# Altium PCB bms_fan_breakout-1_0.PcbDoc
Units mm, origin at the board's own origin, x right, y up, seen from the top; angles counter-clockwise.
Board outline 30 x 30 mm, 4 copper layers (L1, L2, L3, L4), stack 1.586 mm thick; 15 components, 12 nets, 40 pads, 0 vias.
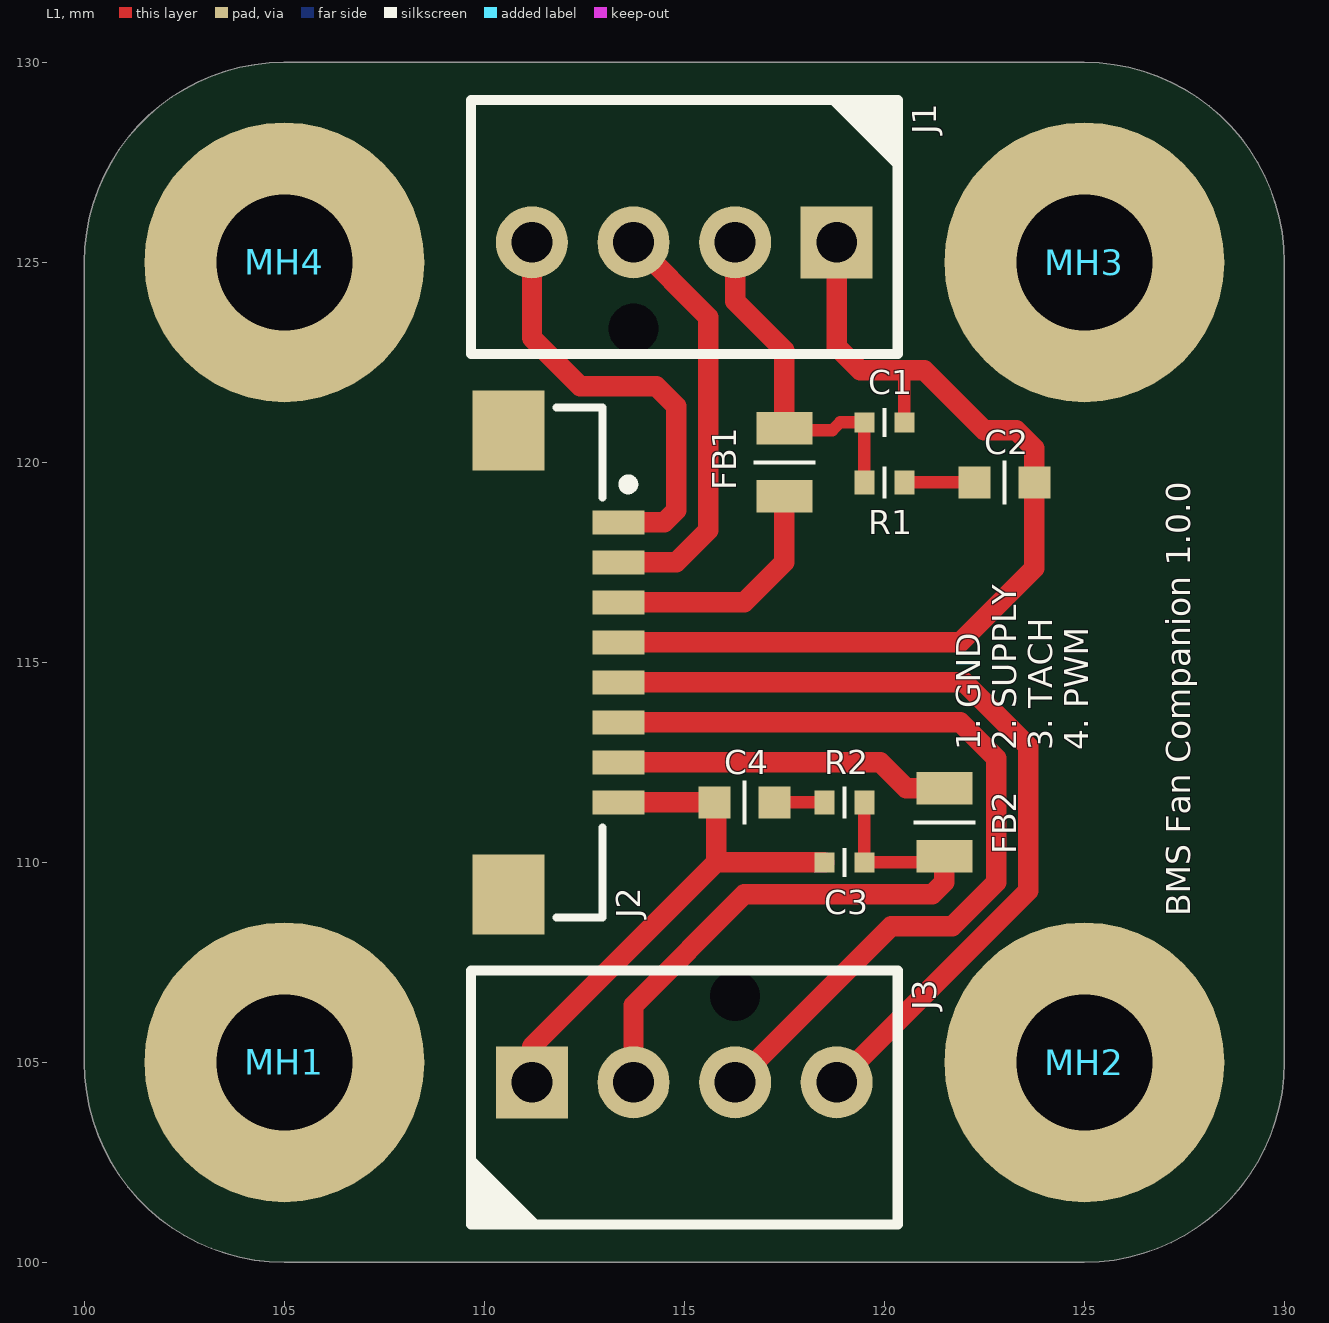
[diagram p0: L1 view]
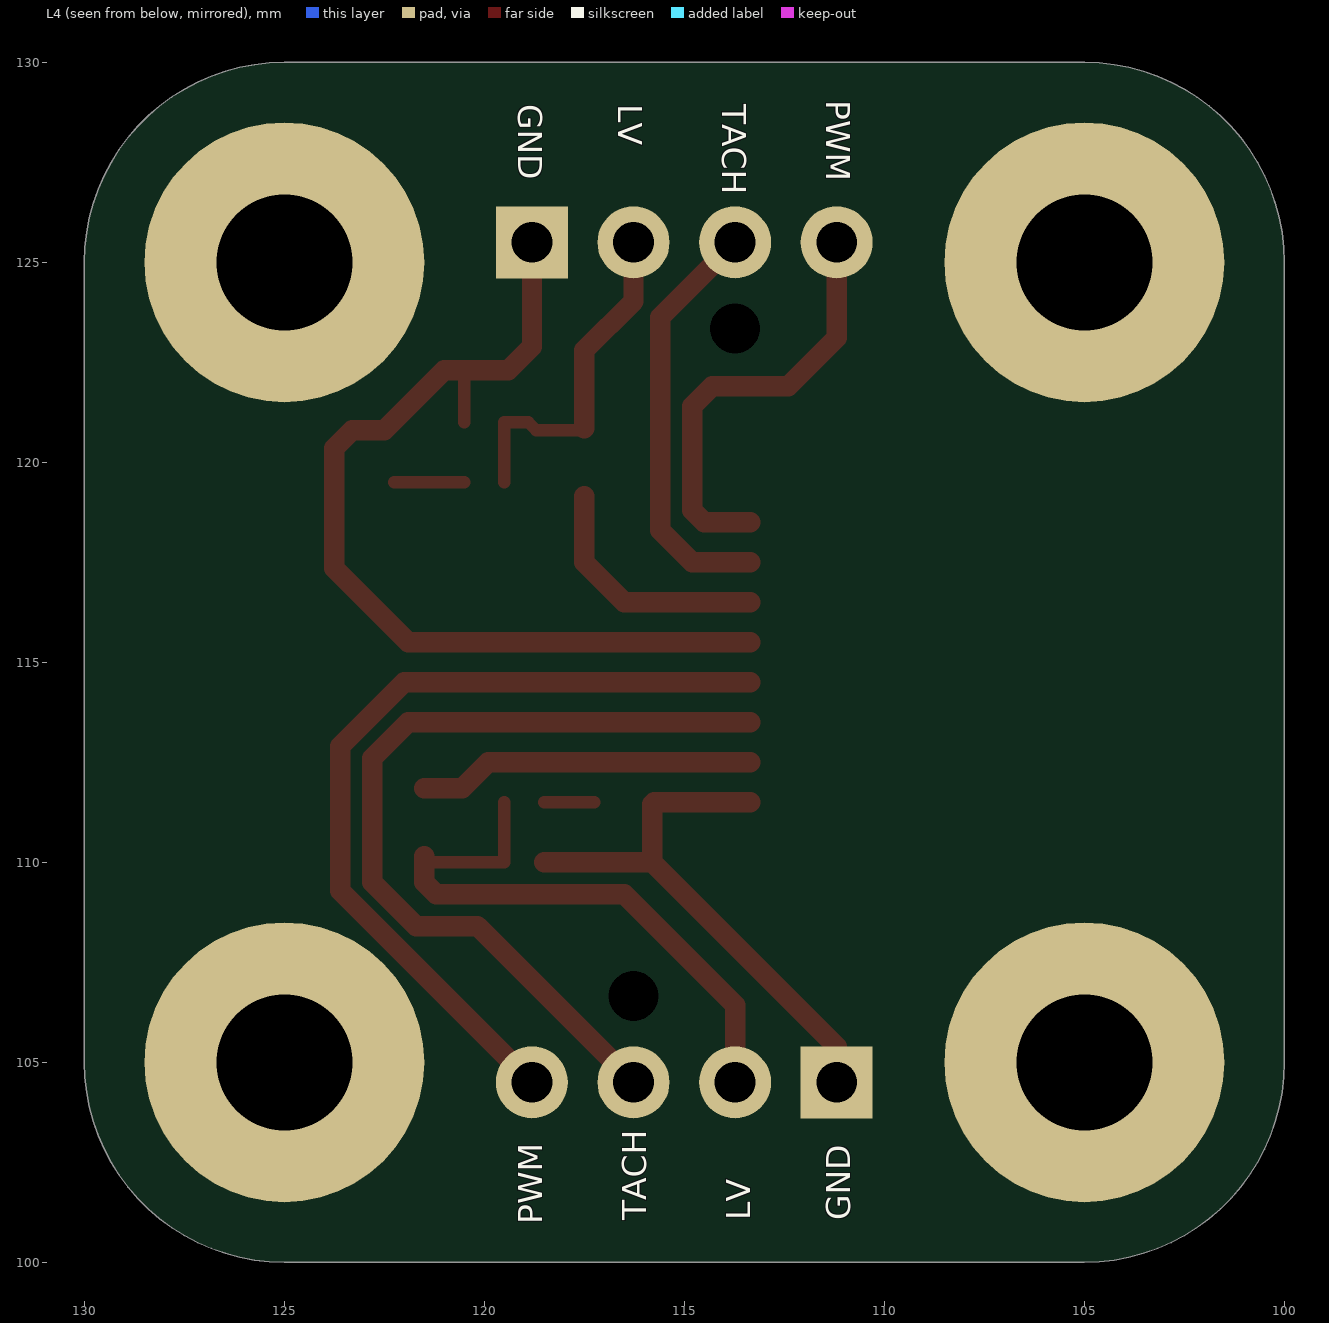
[diagram p1: L4 view, seen from below]

## Layer stack, top to bottom
Top Solder: solder mask 0.0127, Solder Resist, Dk 1
L1: signal copper 0.035
D1: prepreg 0.2104, 7628, Dk 4.4
L2: signal copper 0.0152
D2: core 1.065, Core, Dk 4.6
L3: signal copper 0.0152
D3: prepreg 0.2104, 7628, Dk 4.4
L4: signal copper 0.035
Bottom Solder: solder mask 0.0127, Solder Resist, Dk 1

## Board outline
105,100 cw(c105,105) 100,105 100,125 cw(c105,125) 105,130 125,130 cw(c125,125) 130,125 130,105 cw(c125,105) 125,100

## Design rules (kind name [scope] priority, off if disabled: settings)
AcuteAngle [All] p1: minimum=7.00000000000000E+0001 checktracksonly=FALSE
AssemblyTestPointUsage [All] p1: valid=2
BoardOutlineClearance [All] p1: gap=0.635 ignorepadtopadclearanceinfootprint=FALSE except(0: Arc-SplitContinuation Track-SplitContinuation SMDPad-SplitContinuation THPad-SplitContinuation Via-SplitContinuation Fill-SplitContinuation Poly-SplitContinuation Region-SplitContinuation Text-SplitContinuation)
Clearance [All] p1: gap=0.152 ignorepadtopadclearanceinfootprint=TRUE except(0.254: Fill-Fill Fill-Poly Fill-Region Poly-Poly Poly-Region Region-Region)
ComponentClearance [All] p1 off: gap=0.254 collisioncheckmode=3 verticalgap=0.254 showdistances=FALSE
DiffPairsRouting DE_90 [InDifferentialPairClass('DE_90')] p1: maxlimit=0.203 minlimit=0.152 mostfreqgap=0.203 toplayer_minwidth=0.152 toplayer_maxwidth=0.286 toplayer_prefwidth=0.286 midlayer1_minwidth=0.152 midlayer1_maxwidth=0.286 midlayer1_prefwidth=0.286 midlayer2_minwidth=0.152 midlayer2_maxwidth=0.286 midlayer2_prefwidth=0.286 bottomlayer_minwidth=0.152 bottomlayer_maxwidth=0.286 bottomlayer_prefwidth=0.286 maxuncoupledlength=12.7
DiffPairsRouting DE_100 [InDifferentialPairClass('DE_100')] p2: maxlimit=0.203 minlimit=0.152 mostfreqgap=0.203 toplayer_minwidth=0.152 toplayer_maxwidth=0.22 toplayer_prefwidth=0.22 midlayer1_minwidth=0.152 midlayer1_maxwidth=0.22 midlayer1_prefwidth=0.22 midlayer2_minwidth=0.152 midlayer2_maxwidth=0.22 midlayer2_prefwidth=0.22 bottomlayer_minwidth=0.152 bottomlayer_maxwidth=0.22 bottomlayer_prefwidth=0.22 maxuncoupledlength=12.7
FabricationTestPointUsage [All] p1: valid=2 allowmultiple=FALSE
Height [All] p1: minheight=0 maxheight=50.8 prefheight=12.7
HoleSize [All] p1: absolutevalues=TRUE maxlimit=50.8 minlimit=0.2 maxpercent=80.000 minpercent=20.000
HoleToHoleClearance [All] p1: gap=0.5 allowstackedmicrovias=TRUE
MinimumAnnularRing MinimumViaRing [IsVia] p1: minimumring=0.072
MinimumAnnularRing [All] p2: minimumring=0.15
MinimumSolderMaskSliver [All] p1: minsoldermaskwidth=0.025
PlaneClearance [All] p1: clearance=0.203
PlaneConnect [All] p1: pad.planeconnectstyle=Relief pad.reliefexpansion=0.508 pad.reliefentries=4 pad.reliefconductorwidth=0.381 pad.reliefairgap=0.254 via.planeconnectstyle=Direct via.reliefexpansion=0.508 via.reliefentries=4 via.reliefconductorwidth=0.254 via.reliefairgap=0.254
PolygonConnect Heavy [HasFootprint('RELAY_FTR-J2') or HasFootprint('RELAY_P126') or HasFootprint('TE_ET_2173132-1') or HasFootprint('TE_ET_1982295-2') or HasFootprint('C2220_2.80MM') or HasFootprint('VISHAY_WSL2726') or HasFootprint('FUSEHOLDER_LITTELFUSE_01020071Z') or HasFootprint('EATON_ELV10-xx-2P')] p1: connectstyle=Direct reliefconductorwidth=0.254 reliefentries=4 polygonreliefangle="90 Angle" airgapwidth=0.254
PolygonConnect [All] p2: thpad.connectstyle=Relief thpad.reliefconductorwidth=0.381 thpad.reliefentries=4 thpad.polygonreliefangle="90 Angle" thpad.airgapwidth=0.254 smdpad.connectstyle=Relief smdpad.reliefconductorwidth=0.254 smdpad.reliefentries=4 smdpad.polygonreliefangle="90 Angle" smdpad.airgapwidth=0.254 via.connectstyle=Direct via.reliefconductorwidth=0.254 via.reliefentries=4 via.polygonreliefangle="90 Angle" via.airgapwidth=0.254
RoutingVias [All] p1: holewidth=0.2 width=0.35 viastyle="Through Hole" minholewidth=0.2 minwidth=0.35 maxholewidth=25.4 maxwidth=25.4
SilkToSilkClearance [All] p1: silktosilkclearance=0.076
SilkToSolderMaskClearance SilkscreenOverComponentPads [IsPad] p1: minsilkscreentomaskgap=0.003 clearancetoexposedcopper=FALSE
SolderMaskExpansion Vias [IsVia] p1: expansion=0.051 istentingtop=FALSE soldermaskfromhole=TRUE
SolderMaskExpansion "Default expansion" [All] p2: expansion=0.076 istentingtop=FALSE
UnRoutedNet [All] p1: checkbadconnections=TRUE
Width SE_50 [InNetClass('SE_50')] p1: maxlimit=0.349 minlimit=0.152 preferedwidth=0.349
Width [All] p2: maxlimit=50.8 minlimit=0.152 preferedwidth=0.203
17 further rules are at their usual default settings.

## Components (designator, comment, footprint, x,y, rotation, side; value= is the part's Value field where it differs from the comment)
C1 "CGA2B3X7R1H104M050BB" C0402_0.55MM 120,121 r0 top
C2 "CGJ3E1X7R1E105K080AC" C0603_0.80MM 123,119.5 r0 top
C3 "CGA2B3X7R1H104M050BB" C0402_0.55MM 119,110 r180 top
C4 "CGJ3E1X7R1E105K080AC" C0603_0.80MM 116.5,111.5 r180 top
FB1 "MPZ2012S102AT000" FB0805_1.05MM 117.5,120 r90 top
FB2 "MPZ2012S102AT000" FB0805_1.05MM 121.5,111 r270 top
J1 "47053-1000" MOLEX_KK254_4POS_VERT_0470531000 115,125.5 r0 top
J2 "686108148922" WURTH_WR-FPC_1.00mm_686108148922 110,115 r270 top
J3 "47053-1000" MOLEX_KK254_4POS_VERT_0470531000 115,104.5 r180 top
MH1 "HOLE" HOLE_M3 105,105 r0 top locked
MH2 "HOLE" HOLE_M3 125,105 r0 top locked
MH3 "HOLE" HOLE_M3 125,125 r0 top locked
MH4 "HOLE" HOLE_M3 105,125 r0 top locked
R1 "ERJ-2BQF1R0X" R0402_0.40MM 120,119.5 r180 top
R2 "ERJ-2BQF1R0X" R0402_0.40MM 119,111.5 r0 top

## Footprints (in the part's own frame and the unit in brackets; to place one, negate y for a bottom-side part, rotate by r counter-clockwise, add the part's x,y. Pads: shape width x height; smd on the part's side, far side on the other; paste and mask are expansions set on the pad)
C0402_0.55MM [mm]
  rect 0.5x0.5 smd: 1(-0.5,0) 2(0.5,0)
  silkscreen extent -0.05,-0.36 0.05,0.36, body extent -0.5,-0.25 0.5,0.25, height 0.55
C0603_0.80MM [mm]
  rect 0.8x0.8 smd: 1(-0.75,0) 2(0.75,0)
  silkscreen extent -0.05,-0.55 0.05,0.55, body extent -0.8,-0.4 0.8,0.4, height 0.8
FB0805_1.05MM [mm]
  rect 0.81x1.4 smd: 1(-0.85,0) 2(0.85,0)
  silkscreen extent -0.05,-0.78 0.05,0.77, body extent -1,-0.63 1,0.63, height 1.05
HOLE_M3 [mm]
  round 7 hole 3.4: 1(0,0)
MOLEX_KK254_4POS_VERT_0470531000 [mm]
  rect 1.8x1.8 hole 1.02: 1(3.81,0)
  round 1.8 hole 1.02: 2(1.27,0) 3(-1.27,0) 4(-3.81,0)
  round 0 hole 1.25: 5(-1.27,-2.16)
  silkscreen extent -5.33,-2.79 5.33,3.56, body extent -5.1,-2.54 5.1,3.3, height 10.01
R0402_0.40MM [mm]
  rect 0.5x0.6 smd: 1(-0.5,0) 2(0.5,0)
  silkscreen extent -0.05,-0.4 0.05,0.4, body extent -0.5,-0.25 0.5,0.25, height 0.4
WURTH_WR-FPC_1.00mm_686108148922 [mm]
  rect 0.6x1.3 smd: 1(-3.5,3.35) 2(-2.5,3.35) 3(-1.5,3.35) 4(-0.5,3.35) 5(0.5,3.35) 6(1.5,3.35) 7(2.5,3.35) 8(3.5,3.35)
  rect 2x1.8 smd: EP0(-5.8,0.6) EP1(5.8,0.6)
  silkscreen extent -6.38,1.8 6.38,3.73, body extent -6.3,-2.9 6.3,3.6, height 2.27

## Part data
C1 C3: "CAP CER 0.1UF 50V X7R 0402", Capacitance=0.1µF, Manufacturer="TDK Corporation", Operating Temperature="-55°C ~ 125°C", Package / Case="0402 (1005 Metric)", Supplier Part Number 1=445-12271-1-ND, Temperature Coefficient=X7R, Tolerance=±20%, Voltage - Rated=50V, Applications=AEC-Q200, ComponentLink1Description="Series Datasheet", ComponentLink1URL=https://product.tdk.com/info/en/catalog/datasheets/mlcc_automotive_general_en.pdf?ref_disty=digikey, Manufacturer Part Number=CGA2B3X7R1H104M050BB, Mounting Type="Surface Mount, MLCC", Part Status=Active, Series=CGA, Size / Dimension="0.039\" L x 0.020\" W (1.00mm x 0.50mm)", Supplier 1=Digikey, Thickness (Max)="0.022\" (0.55mm)", Unit Price (USD)=0.17
C2 C4: "CAP CER 1UF 25V X7R 0603", Capacitance=1µF, Manufacturer="TDK Corporation", Operating Temperature="-55°C ~ 125°C", Package / Case="0603 (1608 Metric)", Supplier Part Number 1=445-13311-1-ND, Temperature Coefficient=X7R, Tolerance=±10%, Voltage - Rated=25V, Applications=AEC-Q200, ComponentLink1Description="Series Datasheet", ComponentLink1URL=https://product.tdk.com/info/en/catalog/datasheets/mlcc_highreliability_general_en.pdf?ref_disty=digikey, Manufacturer Part Number=CGJ3E1X7R1E105K080AC, Mounting Type="Surface Mount, MLCC", Part Status=Active, Series=CGJ, Size / Dimension="0.063\" L x 0.031\" W (1.60mm x 0.80mm)", Supplier 1=Digikey, Thickness (Max)="0.031\" (0.80mm)", Unit Price (USD)=0.55
FB1 FB2: "FERRITE BEAD 1 KOHM 0805 1LN", Current Rating (Max)=1.5A, DC Resistance (DCR) (Max)=150mOhm, Manufacturer="TDK Corporation", Operating Temperature="-55°C ~ 125°C", Package / Case="0805 (2012 Metric)", Supplier Part Number 1=445-5223-1-ND, ComponentLink1Description=Datasheet, ComponentLink1URL=https://product.tdk.com/info/en/catalog/datasheets/beads_commercial_power_mpz2012_en.pdf?ref_disty=digikey, Filter Type="Power Line", Height (Max)="0.041\" (1.05mm)", Impedance (Ohms @ 100MHz)=1000, Manufacturer Part Number=MPZ2012S102AT000, Mounting Type="Surface Mount", Part Status=Active, Series=MPZ, Size / Dimension="0.079\" L x 0.049\" W (2.00mm x 1.25mm)", Supplier 1=Digikey
J1 J3: library part CONN_MOLEX_KK254_4POS_VERT_47053-1000, "Board Connector, 4 Contact(s), 1 Row(s), Male, Straight, 0.1 inch Pitch, Solder Terminal, Locking, White Insulator, Receptacle", Manufacturer=Molex, Supplier Part Number 1=WM4330-ND, ComponentLink1Description=Drawing, ComponentLink1URL=https://www.molex.com/content/dam/molex/molex-dot-com/products/automated/en-us/salesdrawingpdf/470/47053/470531000_sd.pdf?inline, ComponentLink2Description="Product page", ComponentLink2URL=https://www.molex.com/en-us/products/part-detail/470531000, Manufacturer Part Number=47053-1000, Supplier 1=Digikey, Supplier 2=LCSC, Supplier Part Number 2=C240840
J2: library part CONN_WURTH_WR-FPC_8POS_1.00mm_686108148922, "WR-FPC 1mm SMT Horiz. Bot. Contact Hinge type", Manufacturer="Wurth Elektronik", Supplier Part Number 1=732-6018-1-ND, ComponentLink1Description=Drawing, ComponentLink1URL=https://www.we-online.com/components/products/datasheet/686104148922.pdf, Manufacturer Part Number=686108148922, Supplier 1=Digikey, Supplier 2=Mouser, Supplier Part Number 2=710-686108148922
R1 R2: "RES SMD 1 OHM 1% 1/6W 0402", Manufacturer="Panasonic Electronic Components", Operating Temperature="-55°C ~ 125°C", Package / Case="0402 (1005 Metric)", Power (Watts)="0.167W, 1/6W", Resistance=1, Supplier Device Package=0402, Supplier Part Number 1=P17252CT-ND, Temperature Coefficient=±250ppm/°C, Tolerance=±1%, ComponentLink1Description=Datasheet, ComponentLink1URL=https://industrial.panasonic.com/cdbs/www-data/pdf/RDN0000/AOA0000C313.pdf, Composition="Thick Film", Features="Automotive AEC-Q200, Current Sense", Height - Seated (Max)="0.016\" (0.40mm)", Manufacturer Part Number=ERJ-2BQF1R0X, Series=ERJ, Size / Dimension="0.039\" L x 0.020\" W (1.00mm x 0.50mm)", Supplier 1=Digikey, Unit Price (USD)=0.41

## Nets (pads, with @x,y where several pads share a name; then routed paths per layer and width w, separated by ;. In a path a pad name is that pad's centre, name@x,y a point inside that pad or via, vN(x,y) a via of type N, cw(c..) or ccw(c..) an arc to the next point about the centre after c; other vN are vias at no path point)
GND1: C1.2 C2.2 J1.1 J2.4 | length 24.1
  L1 w0.305: C1.2 120.5,122.3
  L1 w0.508: J2.4 121.9,115.5 123.75,117.35 C2.2 123.75,120.35 123.3,120.8 122.5,120.8 121,122.3 120.5,122.3 119.4,122.3 118.81,122.89 J1.1
GND2: C3.2 C4.2 J2.8 J3.1 | length 14
  L1 w0.508: J3.1 111.19,105.39 115.8,110 ; J2.8 C4.2 115.8,111.45 115.8,110 ; C3.2 115.8,110
NetC1_1: C1.1 FB1.2 J1.2 R1.2 | length 8.8
  L1 w0.305: FB1.2 117.55,120.8 118.7,120.8 118.9,121 C1.1 R1.2
  L1 w0.508: J1.2 116.27,124.03 117.5,122.8 FB1.2
NetC2_1: C2.1 R1.1 | length 1.8
  L1 w0.305: R1.1 C2.1
NetC3_1: C3.1 FB2.2 J3.2 R2.2 | length 15.2
  L1 w0.305: R2.2 C3.1 121.35,110 FB2.2
  L1 w0.508: J3.2 113.73,106.43 116.5,109.2 121.2,109.2 121.5,109.5 FB2.2
NetC4_1: C4.1 R2.1 | length 1.3
  L1 w0.305: C4.1 R2.1
PWM1: J1.4 J2.1 | length 10.9
  L1 w0.508: J1.4 111.19,123.11 112.4,121.9 114.3,121.9 114.8,121.4 114.8,118.8 114.5,118.5 J2.1
PWM2: J2.5 J3.4 | length 21.3
  L1 w0.508: J2.5 122,114.5 123.6,112.9 123.6,109.29 J3.4
TACH1: J1.3 J2.2 | length 10.6
  L1 w0.508: J2.2 114.8,117.5 115.6,118.3 115.6,123.63 J1.3
TACH2: J2.6 J3.3 | length 21.5
  L1 w0.508: J2.6 121.9,113.5 122.8,112.6 122.8,109.5 121.7,108.4 120.17,108.4 J3.3
VCC1: FB1.1 J2.3 | length 6.2
  L1 w0.508: J2.3 116.5,116.5 117.5,117.5 FB1.1
VCC2: FB2.1 J2.7 | length 8.4
  L1 w0.508: J2.7 119.9,112.5 120.55,111.85 FB2.1
pads on no net: J1.5 J2.EP0 J2.EP1 J3.5 MH1.1 MH2.1 MH3.1 MH4.1

## Silkscreen, mask and mechanical layers (free items; w line width, h text height)
Top Overlay:
  text "1. GND / 2. SUPPLY / 3. TACH / 4. PWM" at 125.1,112.8 h0.6 r90
  text "BMS Fan Companion 1.0.0" at 127.65,108.65 h0.6 r90
Bottom Overlay:
  text "PWM" at 111.45,129.05 h0.6 r90
  text "TACH" at 114.05,128.95 h0.6 r90
  text "LV" at 116.65,128.95 h0.6 r90
  text "GND" at 119.15,128.95 h0.6 r90
  text "GND" at 110.85,101.05 h0.6 r270
  text "LV" at 113.35,101.05 h0.6 r270
  text "TACH" at 115.95,101.05 h0.6 r270
  text "PWM" at 118.55,100.95 h0.6 r270
Board Shape:
  the board outline again, w0.254

## Text inside footprints (layer, text, board x,y; h text height)
J2: Mechanical 1 "End of Flex Tab" at 110.8,118.4 h0.5 r270